# EAGLE board Meter_PCB_V1 (EAGLE 9.0.0)
REV: B
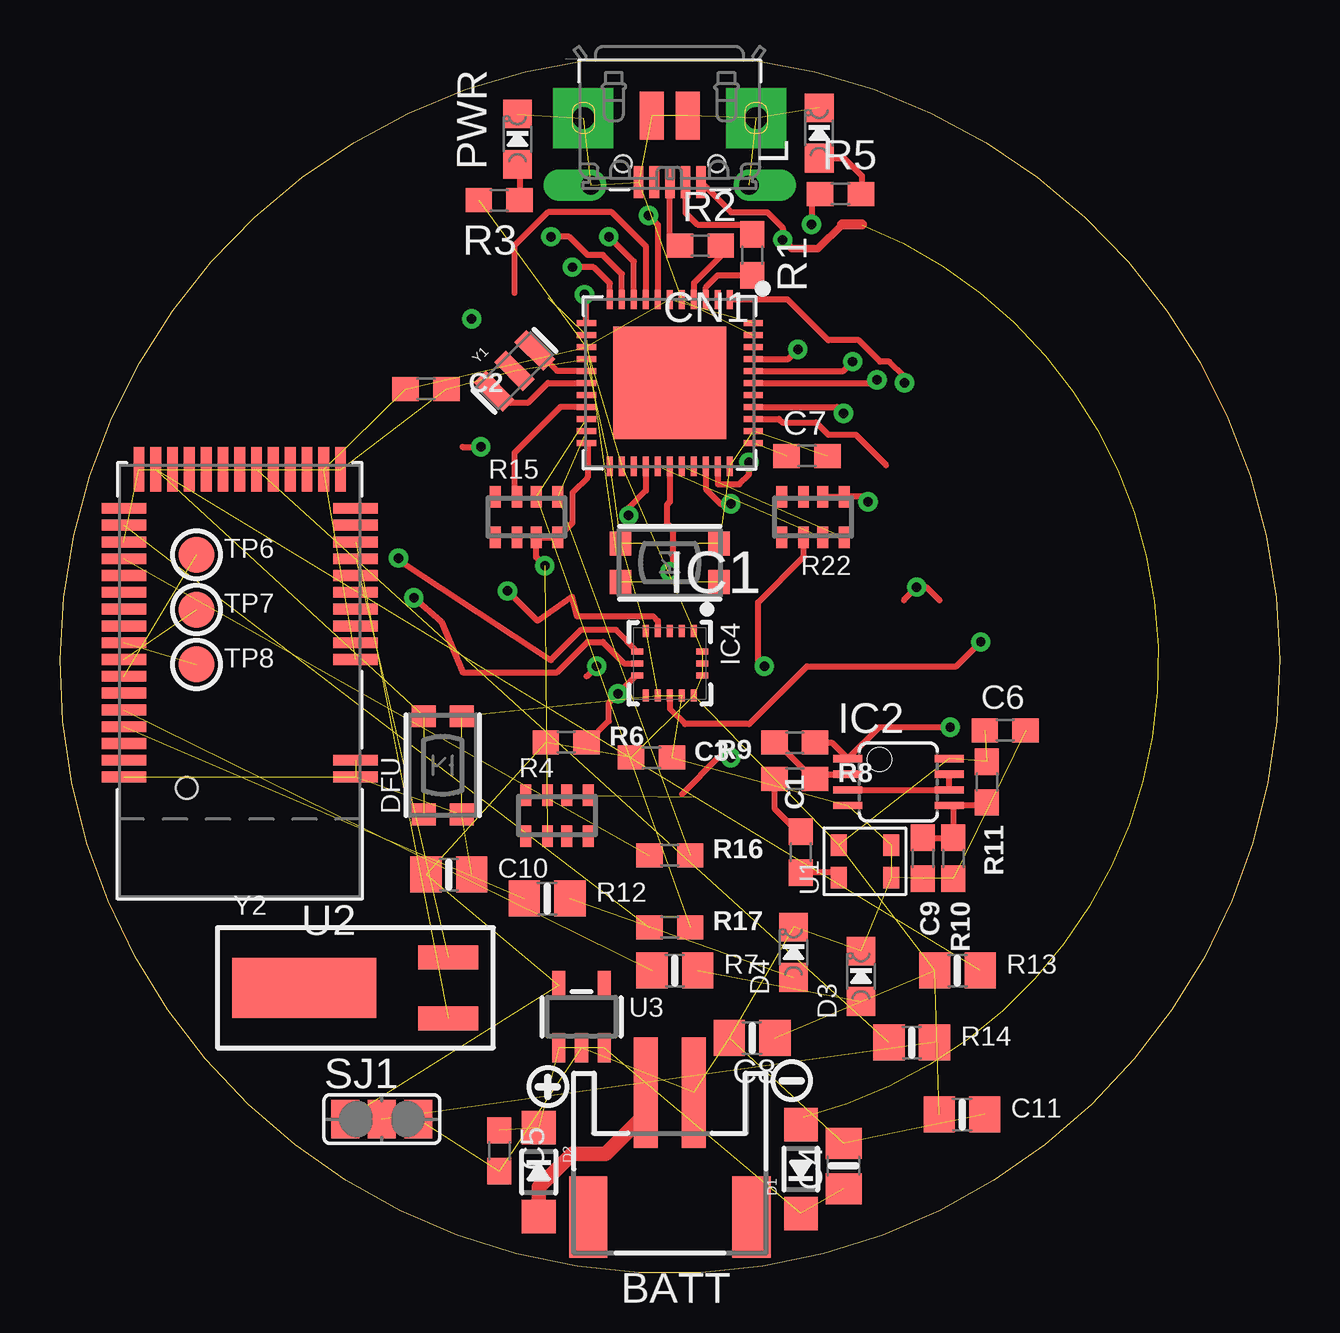
[diagram p0: board, top side]
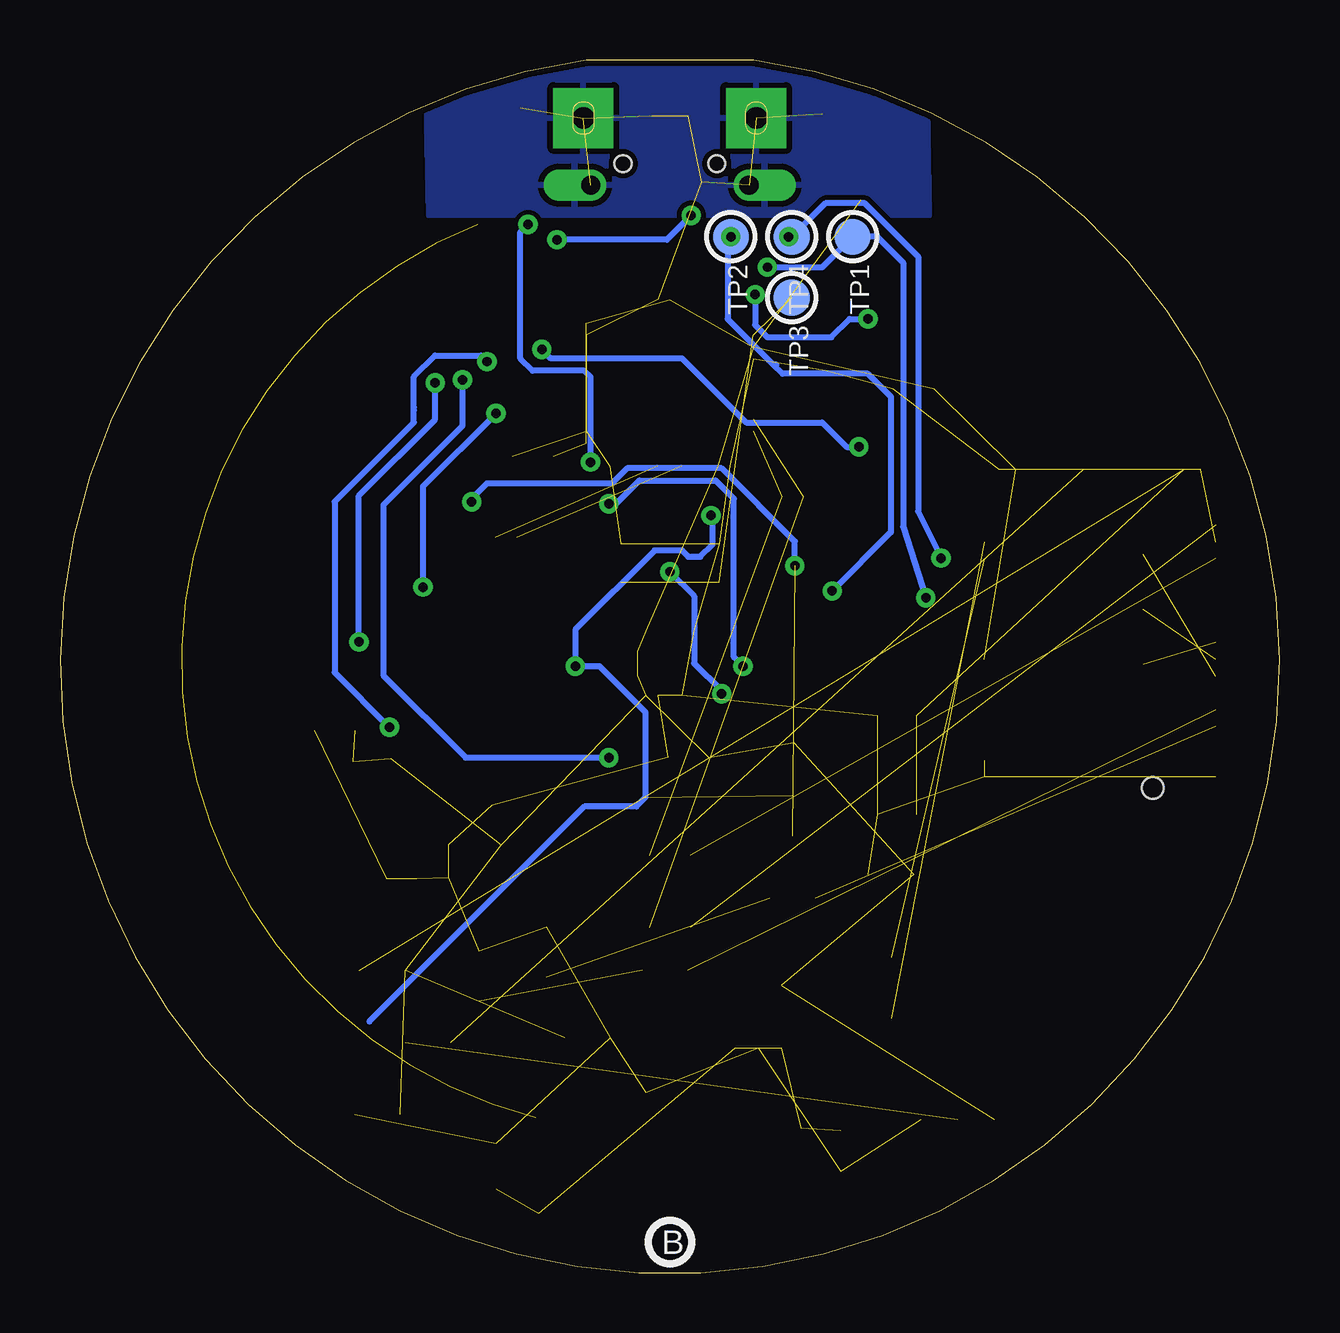
[diagram p1: board, bottom side, seen from below]

Size 50.82 x 50.55 mm. Coordinates in mm from the lower left corner, seen from the top.
Outline: 21.92,50.55 28.9,50.55 arc-344 21.92,50.55
Copper layers (1*16): Top 0.035mm / dielectric 1.5mm / Bottom 0.035mm
Design rules "adafruit *": minimum track width 8mil, minimum drill 15.5mil, track to track 8mil, track to pad 8mil, pad to pad 8mil, via to via 8mil, smd to smd 8mil, copper to edge 10mil, drill to drill 8mil, minimum pad ring 10mil, minimum via ring 8mil, stop-mask expansion 2mil, vias tented up to drill 20mil, thermal gap 10mil

## Footprints (pad centres in the part's own frame; a part is rotated, then mirrored left to right if it is on the bottom)
JSTPH2 = smd 1 x 4.6: 1 -1,-3.7; 2 1,-3.7 | smd 1.6 x 3.4: NC1 -3.4,1.5; NC2 3.4,1.5
0603-NO = smd 1.1 x 1: 1 -0.85,0; 2 0.85,0
0805-NO = smd 1.3 x 1.5: 1 -0.95,0; 2 0.95,0
4UCONN_20329_V2 = smd 1 x 2: BASE@1 -0.75,-2; BASE@2 0.75,-2 | smd 0.4 x 1.35: D+ 0,0.775; D- -0.65,0.775; GND 1.3,0.775; ID 0.65,0.775; VBUS -1.3,0.775 | drill 0.8 pad 1.2 offset: SPRT@1 -3.3,0.9; SPRT@2 3.3,0.9 | drill 0.9 pad 2.5 square: SPRT@3 -3.6,-1.9; SPRT@4 3.6,-1.9 | hole 0.7: -1.95,0; 1.95,0
SOD-123 = smd 1.4 x 1.4: A 1.85,0; C -1.85,0
CHIPLED_0805_NOOUTLINE = smd 1.2 x 1.2: A 0,-1.05; C 0,1.05
BTN_KMR2_4.6X2.8 = smd 0.9 x 1: A 2.05,0.8; A' -2.05,0.8; B 2.05,-0.8; B' -2.05,-0.8
TQFN44_7MM = smd 0.25 x 0.8: 1 -2.5,-3.475; 2 -2,-3.475; 3 -1.5,-3.475; 4 -1,-3.475; 5 -0.5,-3.475; 6 0,-3.475; 7 0.5,-3.475; 8 1,-3.475; 9 1.5,-3.475; 10 2,-3.475; 11 2.5,-3.475; 23 2.5,3.475; 24 2,3.475; 25 1.5,3.475; 26 1,3.475; 27 0.5,3.475; 28 0,3.475; 29 -0.5,3.475; 30 -1,3.475; 31 -1.5,3.475; 32 -2,3.475; 33 -2.5,3.475 | smd 0.8 x 0.25: 12 3.475,-2.5; 13 3.475,-2; 14 3.475,-1.5; 15 3.475,-1; 16 3.475,-0.5; 17 3.475,0; 18 3.475,0.5; 19 3.475,1; 20 3.475,1.5; 21 3.475,2; 22 3.475,2.5; 34 -3.475,2.5; 35 -3.475,2; 36 -3.475,1.5; 37 -3.475,1; 38 -3.475,0.5; 39 -3.475,0; 40 -3.475,-0.5; 41 -3.475,-1; 42 -3.475,-1.5; 43 -3.475,-2; 44 -3.475,-2.5 | smd 4.7 x 4.7: THERMAL 0,0
MSOP08 = smd 0.3 x 1.2: 1 -0.976,-2.113; 2 -0.326,-2.113; 3 0.324,-2.113; 4 0.974,-2.113; 5 0.974,2.112; 6 0.324,2.112; 7 -0.326,2.112; 8 -0.976,2.112
LGA16_3X3MM = smd 0.5 x 0.25: 1 -1.35,1; 2 -1.35,0.5; 3 -1.35,0; 4 -1.35,-0.5; 5 -1.35,-1; 9 1.35,-1; 10 1.35,-0.5; 11 1.35,0; 12 1.35,0.5; 13 1.35,1 | smd 0.25 x 0.5: 6 -0.5,-1.35; 7 0,-1.35; 8 0.5,-1.35; 14 0.5,1.35; 15 0,1.35; 16 -0.5,1.35
RESPACK_4X0603_NO = smd 0.45 x 0.9: 1 -1.3,-0.85; 2 -0.4,-0.85; 3 0.4,-0.85; 4 1.3,-0.85; 5 1.3,0.85; 6 0.4,0.85; 7 -0.4,0.85; 8 -1.3,0.85
SJ_2 = smd 1.168 x 1.6: 1 -1.524,0; 2 0,0; 3 1.524,0
TESTPOINT_ROUND_1.5MM = smd 1.5 x 1.5: P$1 0,0
SPW2430HR5H-B = smd 0.9 x 0.66: 1 -0.675,1.095; 2 -0.675,-1.095; 3 0.675,-1.095; 4 0.675,1.095
BLE_MODULE_RAYTAC_MDBT40 = smd 1.85 x 0.45: 1 -4.825,4; 2 -4.825,3.3; 3 -4.825,-0.9; 4 -4.825,-1.6; 5 -4.825,-2.3; 6 -4.825,-3; 7 -4.825,-3.7; 8 -4.825,-4.4; 9 -4.825,-5.1; 10 -4.825,-5.8; 11 -4.825,-6.5; 12 -4.825,-7.2; 26 4.825,-7.2; 27 4.825,-6.5; 28 4.825,-5.8; 29 4.825,-5.1; 30 4.825,-4.4; 31 4.825,-3.7; 32 4.825,-3; 33 4.825,-2.3; 34 4.825,-1.6; 35 4.825,-0.9; 36 4.825,-0.2; 37 4.825,0.5; 38 4.825,1.2; 39 4.825,1.9; 40 4.825,2.6; 41 4.825,3.3; 42 4.825,4 | smd 0.45 x 1.85: 13 -4.2,-8.825; 14 -3.5,-8.825; 15 -2.8,-8.825; 16 -2.1,-8.825; 17 -1.4,-8.825; 18 -0.7,-8.825; 19 0,-8.825; 20 0.7,-8.825; 21 1.4,-8.825; 22 2.1,-8.825; 23 2.8,-8.825; 24 3.5,-8.825; 25 4.2,-8.825 | hole 0.9: 2.2,4.45
SOT23-5 = smd 0.55 x 1.2: 1 -0.95,-1.3; 2 0,-1.3; 3 0.95,-1.3; 4 0.95,1.3; 5 -0.95,1.3
RESONATOR-SMD = smd 0.7 x 1.7: 1 -1.2,0; 2 0,0; 3 1.2,0
CRYSTAL_CYL_2X6MM_SMT = smd 2.5 x 1: 1 2.125,1.27; 2 2.125,-1.27 | smd 6 x 2.5: CYLINDER -3.875,0

## Placement (x,y rotation side)
BATT  3-6VDC  [JSTPH2]  25.41,3.81 180 top
C1  0.1uF  [0603-NO]  30.87,17.53 90 top
C2  1uF  [0603-NO]  15.25,36.83 0 top
C3  1uF  [0603-NO]  24.65,21.46 0 top
C4  10uF  [0805-NO]  32.65,4.45 90 top
C5  1uF  [0603-NO]  18.3,5.08 270 top
C6  1uF  [0603-NO]  39.38,22.61 0 top
C7  1uF  [0603-NO]  31.12,34.04 0 top
C8  10uF  [0805-NO]  28.84,9.78 180 top
C9  1uF  [0603-NO]  35.95,17.27 270 top
C10  1uF  [0805-NO]  16.2,16.59 0 top
C11  1uF  [0805-NO]  37.59,6.59 0 top
CN1  MicroB USB  [4UCONN_20329_V2]  25.41,46.23 180 top
D1  SCHOTTKY (1A)  [SOD-123]  30.87,4.32 90 top
D2  SCHOTTKY (1A)  [SOD-123]  19.95,4.19 270 top
D3  RED  [CHIPLED_0805_NOOUTLINE]  33.37,12.35 0 top
D4  BLUE  [CHIPLED_0805_NOOUTLINE]  30.56,13.35 0 top
DFU  KMR2  [BTN_KMR2_4.6X2.8]  15.95,21.15 90 top
IC1  ATMEGA32U4-MU  [TQFN44_7MM]  25.41,37.08 180 top
IC2  LMV358MM  [MSOP08]  34.93,20.45 270 top
IC4  LIS3DH  [LGA16_3X3MM]  25.41,25.4 270 top
L  RED  [CHIPLED_0805_NOOUTLINE]  31.63,47.5 0 top
PWR  GREEN  [CHIPLED_0805_NOOUTLINE]  19.06,47.24 0 top
R1  22  [0603-NO]  28.84,42.42 270 top
R2  22  [0603-NO]  26.68,42.8 0 top
R3  1K  [0603-NO]  18.3,44.7 180 top
R4  1M  [RESPACK_4X0603_NO]  20.71,19.05 0 top
R5  1K  [0603-NO]  32.52,44.96 0 top
R6  10K  [0603-NO]  21.09,22.1 0 top
R7  2K  [0805-NO]  25.62,12.59 0 top
R8  1K  [0603-NO]  30.62,20.57 0 top
R9  100K  [0603-NO]  30.62,22.1 180 top
R10  10K  [0603-NO]  37.22,17.27 270 top
R11  20K  [0603-NO]  38.62,20.45 270 top
R12  2K  [0805-NO]  20.3,15.59 0 top
R13  10K  [0805-NO]  37.39,12.59 0 top
R14  2K  [0805-NO]  35.49,9.59 0 top
R15  1M  [RESPACK_4X0603_NO]  19.44,31.5 0 top
R16  0  [0603-NO]  25.41,17.4 0 top
R17  0  [0603-NO]  25.41,14.4 0 top
R22  1M  [RESPACK_4X0603_NO]  31.38,31.5 180 top
RESET  KMR2  [BTN_KMR2_4.6X2.8]  25.41,29.59 180 top
SJ1  [SJ_2]  13.41,6.4 0 top
TP1  MISO  [TESTPOINT_ROUND_1.5MM]  17.79,43.18 270 bottom
TP2  SCK  [TESTPOINT_ROUND_1.5MM]  22.87,43.18 270 bottom
TP3  RST  [TESTPOINT_ROUND_1.5MM]  20.33,40.64 270 bottom
TP4  MOSI  [TESTPOINT_ROUND_1.5MM]  20.33,43.18 270 bottom
TP6  MISO  [TESTPOINT_ROUND_1.5MM]  5.69,29.92 0 top
TP7  MISO  [TESTPOINT_ROUND_1.5MM]  5.69,27.64 0 top
TP8  MISO  [TESTPOINT_ROUND_1.5MM]  5.69,25.35 0 top
U1  SPW2430  [SPW2430HR5H-B]  33.54,17.15 90 top
U2  MBT40  [BLE_MODULE_RAYTAC_MDBT40]  7.49,24.66 180 top
U3  AP2112K-3.3  [SOT23-5]  21.73,10.67 0 top
U$1  [SYMBOL_MINUS]  30.49,8 0 top
U$7  [PCBFEAT-REV-040]  25.41,1.27 0 bottom
U$34  [CPLAYFRONT]  0.01,0 0 top
U$35  [SYMBOL_PLUS]  20.33,7.75 0 top
U$46  [CPLAYBACK]  50.81,0 0 bottom
Y1  8MHz  [RESONATOR-SMD]  18.93,37.59 45 top
Y2  32.768kHz (535-9166-2-ND)  [CRYSTAL_CYL_2X6MM_SMT]  14.06,11.88 0 top

## Library data of the parts
BATT C1-C11 CN1 D1-D4 DFU IC1 IC4 L PWR R1-R17 R22 RESET TP1-TP4 TP6-TP8 U1-U3 U$1 U$7 U$34 U$35 U$46 Y2 = microbuilder
IC2 = linear
SJ1 = jumper
Y1 = SparkFun

## Nets
3.3V: C2.1 C3.1 C6.1 C7.1 C8.1 C10.1 C11.1 IC1.6 IC1.14 IC1.24 IC1.34 IC1.44 IC2.8 IC4.1 IC4.13 IC4.14 IC4.15 IC4.16 R3.2 R6.1 R11.1 R13.1 SJ1.1 U1.4 U2.3 U2.14 U3.5
+5V: CN1.VBUS D1.A IC1.7
A0_TEMP_SENSE: IC1.36
A1_RIGHTBUTTON: IC1.37
A2: IC1.38
A3_SWITCH: IC1.39
A4_SOUND_SENSE: IC1.40 IC2.1 R9.1
A5_LIGHT_SENSE: IC1.41
AREF: IC1.42
CONN_LED: R12.1 U2.39
D0/RX: IC1.20 R15.6 R17.2
D1/TX: IC1.21 R15.5 R16.2
D2_SDA: IC1.19
D3_SCL: IC1.18
D6: IC1.27 R22.7
D7_LISINT: IC1.1 IC4.11
D8: IC1.28 IC4.8 R6.2
D9: IC1.29 R22.8
D10: IC1.30
D11: IC1.12
D12: IC1.26 R4.7
D13: IC1.32 R5.1
D+: CN1.D+ R2.1
D-: CN1.D- R1.1
DCC: U2.15
DEC2: U2.41
DFU: DFU.A DFU.A' R13.2 U2.24
FCTRYRST_3V: TP8.P$1 U2.34
GND: BATT.1 C2.2 C3.2 C4.2 C5.2 C6.2 C7.2 C8.2 C9.2 C10.2 C11.2 CN1.BASE@1 CN1.BASE@2 CN1.GND CN1.SPRT@1 CN1.SPRT@2 CN1.SPRT@3 CN1.SPRT@4 D3.C D4.C DFU.B DFU.B' IC1.5 IC1.15 IC1.23 IC1.33 IC1.35 IC1.43 IC2.4 IC4.5 IC4.10 IC4.12 L.C PWR.C R10.2 RESET.B RESET.B' SJ1.3 U1.2 U1.3 U2.1 U2.2 U2.13 U2.16 U2.25 U2.28 U2.42 U3.2 Y1.2
LEFTBUTTON: IC1.25
MISO: IC1.11 IC4.7 TP1.P$1
MODE: R14.1 U2.18
MODE_LED: R7.1 U2.38
MOSI: IC1.10 IC4.6 TP4.P$1
N$1: PWR.A R3.1
N$2: IC2.2 R8.2 R9.2
N$3: IC1.3 R1.2
N$4: IC1.4 R2.2
N$5: D3.A R7.2
N$6: C9.1 IC2.5 R10.1 R11.2
N$7: BATT.2 D2.A
N$8: IC1.17 Y1.1
N$9: IC1.16 Y1.3
N$10: L.A R5.2
N$11: D4.A R12.2
N$12: U2.9 Y2.1
N$13: U2.10 Y2.2
N$14: R14.2 SJ1.2
N$15: C1.2 R8.1
NEOPIX: IC1.8
RST: IC1.13 RESET.A RESET.A' TP3.P$1
RXI: R16.1 U2.29
SCK: IC1.9 IC4.4 TP2.P$1
SOUNDOUT: C1.1 U1.1
SPEAKER: IC1.31
SWCLK: TP6.P$1 U2.36
SWDIO/RST_3V: TP7.P$1 U2.35
TXLED: IC1.22 R4.2 R15.3 R15.4 R22.1 R22.2
TXO: R17.1 U2.27
VCC: C4.1 C5.1 D1.C D2.C U3.1 U3.3
VCC/2: IC2.3 IC2.6 IC2.7

## Tracks (layer width: path | path; a pad name or v marks a point on that pad's centre or on a via)
3.3V  (26 unrouted)
+5V  (via drill 0.39)  (1 unrouted)
  Top 0.254: v24.52,44.07 24.91,43.68 IC1.7 | CN1.VBUS 27.97,44.2 29.47,44.2 30.11,43.56 v30.11,43.05 | 30.87,6.22 D1.A
  Top 0.305: 32.59,43.69 31.57,42.67 30.49,42.67 v30.11,43.05
  Top 0.406: 33.41,43.69 32.59,43.69
  Top 0.61: 31,6.48 30.87,6.35 D1.A
  Bottom 0.254: v24.52,44.07 25.54,43.05 v30.11,43.05
A0_TEMP_SENSE
  Top 0.254: IC1.36 29.96,35.58 30.11,35.43 31.51,35.43 32.01,34.93 33.16,34.93 34.43,33.66
A1_RIGHTBUTTON  (via drill 0.39)
  Top 0.254: IC1.37 32.38,36.08 v32.65,35.81 | 35.16,28.04 v35.7,28.58 36.1,28.58 36.64,28.04
  Bottom 0.254: v32.65,35.81 35.7,32.77 v35.7,28.58
A3_SWITCH  (via drill 0.39)
  Top 0.254: IC1.39 34.05,37.08 v34.05,37.21 | v27.95,21.46 27.44,21.46 25.92,19.95
  Bottom 0.254: v27.95,21.46 33.92,21.46 37.35,24.89 37.35,32 34.05,35.31 v34.05,37.21
A4_SOUND_SENSE  (via drill 0.39)
  Top 0.254: IC1.40 32.64,37.58 v33.03,37.97 | IC2.1 32.4,21.42 | v37.09,22.73 34.13,22.73 IC2.1 | R9.1 32.15,22.1 IC2.1
  Bottom 0.254: v33.03,37.97 33.28,38.23 35.19,38.23 36.08,37.34 36.08,36.07 36.08,35.94 36.08,35.43 39.38,32.13 39.38,25.02 v37.09,22.73
A5_LIGHT_SENSE  (via drill 0.39)
  Top 0.254: IC1.41 30.35,38.08 v30.74,38.48 | 16.76,34.42 v17.54,34.42
  Bottom 0.254: v17.54,34.42 18.04,34.42 19.06,35.43 22.23,35.43 24.9,38.1 30.36,38.1 v30.74,38.48
CONN_LED  (1 unrouted)
D0/RX  (2 unrouted)
D1/TX  (2 unrouted)
D2_SDA
  Top 0.254: IC1.19 20.85,36.08 18.93,34.16 18.93,32.45
D6  (1 unrouted)
D7_LISINT  (via drill 0.39)
  Top 0.254: IC4.11 25.41,23.5 26.04,22.86 28.71,22.86 31.12,25.27 37.35,25.27 v38.36,26.29 | v35.19,37.08 35.19,37.34 34.55,37.97 34.17,37.97 33.28,38.86 32.01,38.86 30.32,40.56 IC1.1
  Bottom 0.254: v38.36,26.29 38.36,32.39 35.19,35.56 v35.19,37.08
D8  (via drill 0.39)
  Top 0.254: IC1.28 25.41,32.13 25.28,32 25.28,31.24 25.54,30.99 25.54,29.34 v25.41,29.21 | R6.2 21.98,22.1 22.87,22.99 22.87,23.75 v23.25,24.13 24.02,24.9 IC4.8
  Bottom 0.254: v25.41,29.21 24.39,28.19 24.39,25.4 23.25,24.26 v23.25,24.13
D9  (1 unrouted)
D11  (via drill 0.39)
  Top 0.254: IC1.12 21.93,40.69 v21.85,40.77
  Bottom 0.254: v21.85,40.77 21.85,39.5 21.35,38.99 18.68,38.99 17.92,39.75 v17.15,39.75
D12  (via drill 0.39)  (1 unrouted)
  Top 0.254: IC1.26 24.41,32.59 23.7,31.88 v23.7,31.56 | v29.35,25.27 29.09,25.53 29.09,27.94 31,29.85 31,30.65
  Bottom 0.254: 37.93,10.47 28.97,19.43 26.81,19.43 26.43,19.81 26.43,23.37 28.33,25.27 v29.35,25.27 29.35,26.8 26.04,30.1 24.9,30.1 24.65,29.85 24.14,29.85 23.63,30.35 23.63,31.5 v23.7,31.56
D13  (via drill 0.39)
  Top 0.254: IC1.32 27.41,32.87 28.31,32.87 28.71,33.27 v28.71,33.78 | v31.31,43.69 31.31,44.6 R5.1
  Bottom 0.254: v28.71,33.78 28.71,37.34 28.97,37.59 31.12,37.59 31.63,38.1 31.63,43.37 v31.31,43.69
D+
  Top 0.254: R2.1 25.41,43.22 CN1.D+
D-
  Top 0.254: CN1.D- 26.06,44.18 26.55,43.69 28.42,43.69 R1.1
DFU  (3 unrouted)
FCTRYRST_3V  (1 unrouted)
GND  (48 unrouted)
  pour Bottom: 14.74,50.8 14.61,44.07 35.44,44.07 35.57,50.8
MISO  (via drill 0.39)
  Top 0.254: IC1.11 22.91,41.24 22.23,41.91 v21.35,41.91 | v14.74,28.13 15.88,27.13 16.77,25.02 20.71,25.02 21.98,26.29 22.62,26.29 23.5,25.4 IC4.7
  Bottom 0.254: v21.35,41.91 19.06,41.91 TP1.P$1 16.77,43.18 15.69,42.1 15.69,31.08 v14.74,28.13
MODE  (1 unrouted)
MODE_LED  (1 unrouted)
MOSI  (via drill 0.39)
  Top 0.254: IC1.10 23.41,41.62 22.62,42.42 21.98,42.42 21.22,43.18 v20.46,43.18 | v14.11,29.78 14.36,29.53 20.46,25.53 21.73,26.8 23.16,26.8 IC4.6
  Bottom 0.254: v20.46,43.18 TP4.P$1 18.93,44.58 17.28,44.58 15.06,42.35 15.06,31.73 v14.11,29.78
N$1
  Top 0.254: PWR.A arc-90 19.15,46.11 R3.1
N$2
  Top 0.254: IC2.2 31.67,20.77 R8.2 31.34,20.7 31.25,20.7 29.85,22.1 R9.2
N$3
  Top 0.254: IC1.3 26.91,41.07 27.4,41.57 R1.2
N$4
  Top 0.254: R2.2 27.57,42.8 27.57,42.41 26.41,41.25 IC1.4
N$5  (1 unrouted)
N$6
  Top 0.254: C9.1 R10.1 37.22,19.47 IC2.5 38.49,19.47 R11.2
N$7
  Top 0.254: 24.52,6.73 24.52,7.4 BATT.2
  Top 0.61: D2.A 19.95,3.56 21.35,4.95 22.74,4.95 24.52,6.73
N$8
  Top 0.254: IC1.17 20.33,37.08 19.51,36.27 18.61,36.27 18.13,36.74 Y1.1
N$9
  Top 0.254: IC1.16 21.93,37.59 20.71,37.59 19.86,38.44 Y1.3
N$10
  Top 0.254: L.A 32.68,46.45 33.41,45.72 33.41,45 R5.2
N$11  (1 unrouted)
N$12  (1 unrouted)
N$13  (1 unrouted)
N$14  (1 unrouted)
N$15
  Top 0.254: R8.1 29.77,19.35 30.74,18.38 C1.2
NEOPIX
  Top 0.254: 18.93,40.84 18.93,42.8 20.33,44.2 23,44.2 24.41,42.78 IC1.8
RST  (3 unrouted)
RXI  (1 unrouted)
SCK  (via drill 0.39)
  Top 0.254: IC1.9 23.91,42.14 TP2.P$1 | IC4.4 24.91,27.17 24.71,27.37 21.54,27.37 21.33,28.16 19.9,27.16 v18.65,28.42
  Bottom 0.254: 23.25,42.8 23,43.05 | 23,43.05 TP2.P$1 | 23,43.05 23,39.75 21.09,37.85 | 20.96,37.85 21.09,37.85 | 21.09,37.85 20.71,37.47 17.15,37.47 16.2,36.51 16.2,30.86 v18.65,28.42
  other vias: 22.87,43.18
SOUNDOUT
  Top 0.254: U1.1 32.24,16.68 C1.1
SPEAKER  (via drill 0.39)
  Top 0.254: IC1.31 26.91,32.66 27.53,32.04 v27.95,32.04 | v22.36,25.27 21.94,24.85
  Bottom 0.254: v22.36,25.27 22.74,25.65 22.74,32.26 23.5,33.02 26.68,33.02 27.66,32.04 v27.95,32.04
SWCLK  (1 unrouted)
SWDIO/RST_3V  (1 unrouted)
TXLED  (via drill 0.39)  (1 unrouted)
  Top 0.254: R22.2 R22.1 33.45,32.35 v33.66,32.13 | IC1.22 21.98,34.54 21.98,33.15 21.35,32.51 21.35,31.25 R15.4 R15.3 19.84,29.83 v20.2,29.46
  Bottom 0.254: v20.2,29.46 20.2,30.48 23.25,33.53 27.19,33.53 27.82,32.89 33.03,32.89 33.66,32.26 v33.66,32.13
TXO  (1 unrouted)
VCC  (5 unrouted)
VCC/2
  Top 0.254: IC2.3 IC2.6 IC2.7